# Altium PCB PCB2CPY.PcbDoc
Units mil, origin at the board's own origin, x right, y up, seen from the top; angles counter-clockwise.
Board outline 6000 x 4000 mil, 2 copper layers (Top Layer, Bottom Layer); 73 components, 143 nets, 481 pads, 98 vias.
Unrouted connection lines stored in the file: 189.
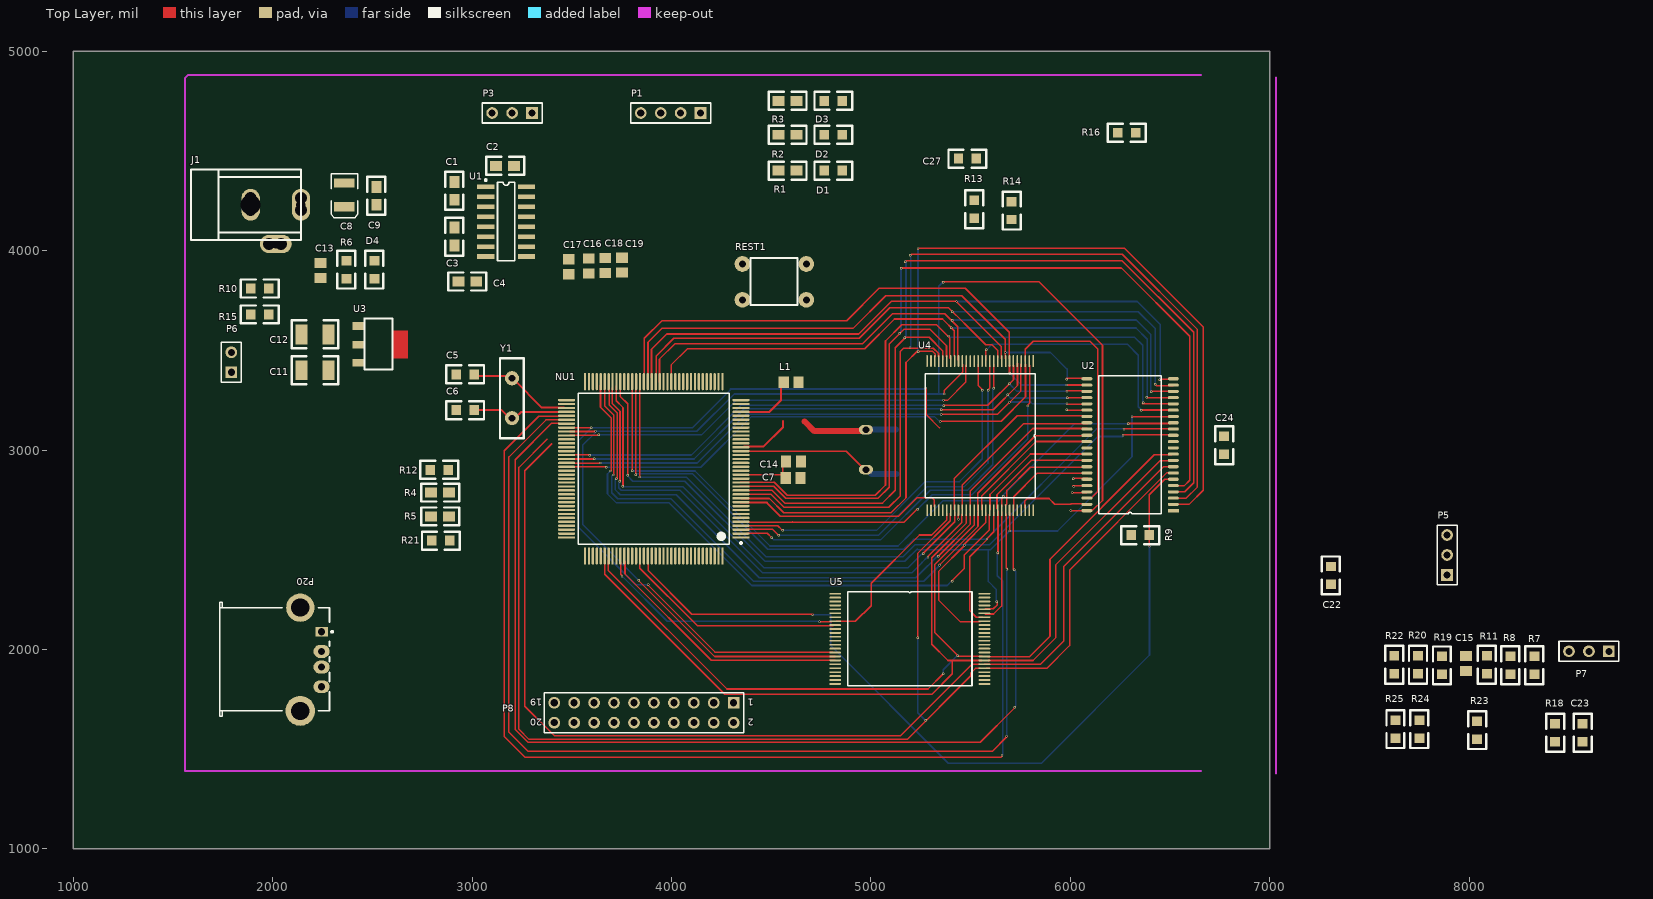
[diagram p0: Top Layer view]
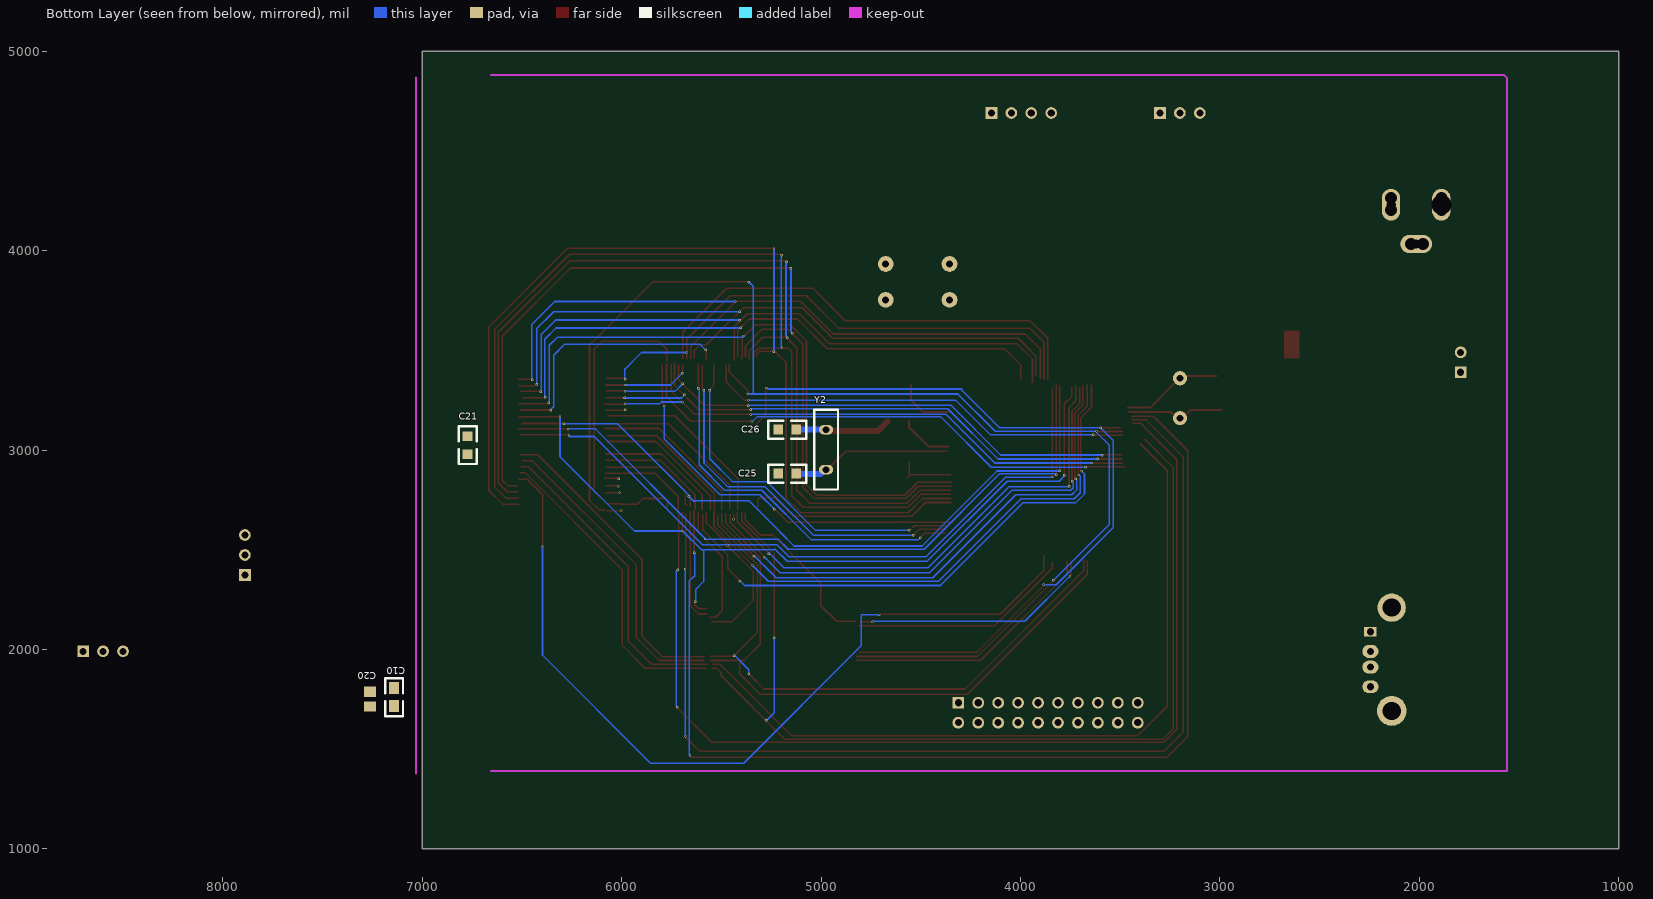
[diagram p1: Bottom Layer view, seen from below]

## Layer stack, top to bottom
Top Layer: signal copper 1.4
Dielectric: dielectric 12.6, FR-4, Dk 4.8
Bottom Layer: signal copper 1.4

## Board outline
1000,1000 7000,1000 7000,5000 1000,5000

## Design rules (kind name [scope] priority, off if disabled: settings)
Clearance [All] p1: gap=6
PolygonConnect [All] p1: connectstyle=Relief reliefconductorwidth=10 reliefentries=4 polygonreliefangle="90 Angle"
RoutingVias [All] p1: holewidth=28 width=50 viastyle="Through Hole" minholewidth=28 minwidth=50 maxholewidth=28 maxwidth=50
SilkscreenOverComponentPads [All] p1: minsilkscreentomaskgap=10
SolderMaskExpansion [All] p1: expansion=4
TestPointUsage [All] p1: valid=0 allowmultiple=FALSE
Testpoint [All] p1: side=15 testpointundercomponent=TRUE minsize=40 maxsize=100 preferedsize=60 minholesize=0 maxholesize=40 preferedholesize=32 testpointgrid=1 style=1023 order=0-112345678
Width [All] p1: maxlimit=50 minlimit=6 preferedwidth=10 minimp=50.000000 maximp=50.000000 favimp=50.000000
23 further rules are at their usual default settings.

## Classes and differential pairs
net class U1_Nets: GND NetC1_1 NetC1_2 NetC2_2 NetC3_1 NetC3_2 NetC4_1 NetU1_7 NetU1_8 NetU1_9 NetU1_10 PA9 PA10 R1IN T1OUT VDD5
net class C4_Nets: GND NetC4_1
net class C2_Nets: NetC2_2 VDD5
component class EXTERN: 1 C1 C2 C3 C4 D1 D2 D3 P1 P3 P20 R1 R2 R3 R4 R5 U1
component class GPIO_OUT: C5 C6 Y1
component class POWER: C7 C8 C9 C10 C11 C12 C13 C14 C15 C16 C17 C18 C19 C20 D4 J1 L1 NU1 R6 U3
component class STORAGE: C21 C22 C23 C24 P5 P6 R7 R8 R9 R10 R11 R12 R13 R14 R15 U2 U4 U5
component class "XLAT AND JTAG": C25 C26 C27 P7 P8 R16 R18 R19 R20 R21 R22 R23 R24 R25 REST1 Y2
net class C1_Nets: NetC1_1 NetC1_2
net class C3_Nets: NetC3_1 NetC3_2
net class C5_Nets: GND PB14
net class C6_Nets: GND PB15
net class C7_Nets: GND VDD33
net class C8_Nets: GND VDD5
net class C9_Nets: GND VDD5
net class C10_Nets: GND VDD33
net class C11_Nets: GND VDD5
net class C12_Nets: GND VDD33
net class C13_Nets: GND VDD5
net class C14_Nets: GND VDD33
net class C15_Nets: GND VDD33
net class C16_Nets: GND VDD33
net class C17_Nets: GND VDD33
net class C18_Nets: GND VDD33
net class C19_Nets: GND VDD33
net class C20_Nets: GND VDD33
net class C21_Nets: GND VDD33
net class C22_Nets: GND VDD33
net class C23_Nets: GND VDD33
net class C24_Nets: GND NetC24_1
net class C25_Nets: GND OSCIN
net class C27_Nets: GND NRST
net class D1_Nets: NetD1_2 VDD33
net class D2_Nets: NetD2_2 VDD33
net class D3_Nets: NetD3_2 VDD33
net class D4_Nets: GND NetD4_1
net class J1_Nets: GND VDD5
net class L1_Nets: NetL1_1 VDD33
net class NU1_Nets: A0 A1 A2 A3 A4 A5 A6 A7 A8 A9 A10 A11 A12 A13 A14 A15 A16 A17 A18 A19 A20 A21 A22 A23 BOOT0 D0 D1 D2 D3 D4 D5 D6 D7 D8 D9 D10 D11 D12 D13 D14 D15 GND LED0 LED1 LED2 NetL1_1 NetNU1_6 NetNU1_106 NRST OSCIN OSCOUT PA0 PA1 PA2 PA3 PA4 PA5 PA6 PA7 PA8 PA9 PA10 PA11 PA12 PA13 PA14 PA15 PB0 PB1 PB2 PB3 PB4 PB5 PB6 PB7 PB8 PB9 PB10 PB11 PB12 PB13 PB14 PB15 PC0 PC1 PC2 PC3 PC4 PC5 PC6 PC7 PC8 PC9 PC10 PC11 PC12 PC13 PC14 PC15 PD2 PD3 PD4 PD5 PD6 PD7 PE0 PE1 PF6 PF10 PF11 PG6 PG7 PG8 PG9 PG10 PG11 PG12 PG13 PG14 PG15 VDD33
net class P1_Nets: PA5 PA6 PA7 PA8
net class P3_Nets: GND R1IN T1OUT
net class P5_Nets: NetP5_2 PD6 PG6
net class P6_Nets: GND NetP6_2
net class P7_Nets: BOOT0 GND VDD33
net class P8_Nets: GND NetP8_11 NetP8_17 NetP8_19 NRST PA13 PA14 PA15 PB3 PB4 VDD33
net class P20_Nets: GND NetP20_2 NetP20_3 NetP20_5 NetP20_6 "USB 5V"
net class R1_Nets: LED0 NetD1_2
net class R2_Nets: LED1 NetD2_2
net class R3_Nets: LED2 NetD3_2
net class R4_Nets: NetP20_2 PA11
net class R5_Nets: NetP20_3 PA12
net class R6_Nets: NetD4_1 VDD33
net class R7_Nets: GND NetR7_1
net class R8_Nets: NetR7_1 VDD33
net class R9_Nets: PG10 VDD33
net class R10_Nets: NetR10_1 VDD33
net class R11_Nets: PG9 VDD33
net class R12_Nets: PG6 VDD33
net class R13_Nets: PD6 VDD33
net class R14_Nets: NetC24_1 VDD33
net class R15_Nets: NetP6_2 VDD33
net class R16_Nets: NRST VDD33
net class R18_Nets: PB4 VDD33
net class R20_Nets: PA14 VDD33
net class R21_Nets: PA13 VDD33
net class R22_Nets: GND PA14
net class R23_Nets: GND NetP8_11
net class R24_Nets: GND NetP8_17
net class R25_Nets: GND NetP8_19
net class REST1_Nets: GND NRST
net class U2_Nets: A0 A1 A2 A3 A4 A5 A6 A7 A8 A9 A10 A11 A12 A13 A14 A15 A16 A17 A18 D0 D1 D2 D3 D4 D5 D6 D7 D8 D9 D10 D11 D12 D13 D14 D15 GND PD4 PD5 PE0 PE1 PG10 VDD33
net class U3_Nets: GND VDD5 VDD33
net class A[0..23]: A0 A1 A2 A3 A4 A5 A6 A7 A8 A9 A10 A11 A12 A13 A14 A15 A16 A17 A18 A19 A20 A21 A22 A23 NetU4_1 NetU4_27 NetU4_28 NetU4_30 NetU4_55 NetU4_56
net class U5_Nets: A16 A17 D0 D1 D2 D3 D4 D5 D6 D7 GND NetP5_2 NetR7_1 PD4 PD5 PD7 VDD33
net class Y1_Nets: PB14 PB15
net class D[0..15]: AD0 AD1 AD2 AD3 AD4 AD5 AD6 AD7 AD8 AD9 AD10 AD11 AD12 AD13 AD14 AD15 AD16 AD17 AD18 AD19 AD20 AD21 AD22 AD23 D0 D1 D2 D3 D4 D5 D6 D7 D8 D9 D10 D11 D12 D13 D14 D15 DATA0 DATA1 DATA2 DATA3 DATA4 DATA5 DATA6 DATA7 DATA8 DATA9 DATA10 DATA11 DATA12 DATA13 DATA14 DATA15 NetU4_1 NetU4_27 NetU4_28 NetU4_30 NetU4_55 NetU4_56
net class U4_Nets: A0 A1 A2 A3 A4 A5 A6 A7 A8 A9 A10 A11 A12 A13 A14 A15 A16 A17 A18 A19 A20 A21 A22 D0 D1 D2 D3 D4 D5 D6 D7 D8 D9 D10 D11 D12 D13 D14 D15 GND NetC24_1 NetP6_2 NetR10_1 NetU4_1 NetU4_27 NetU4_28 NetU4_30 NetU4_55 NetU4_56 PD4 PD5 PD6 PG9 VDD33
net class R19_Nets: PA15 VDD33
net class C26_Nets: GND OSCOUT
net class Y2_Nets: OSCIN OSCOUT

## Components (designator, comment, footprint, x,y, rotation, side; value= is the part's Value field where it differs from the comment)
C1 "0.1uF" 0805#1 2911,4345 r270 top
C2 "0.1uF" 0805#1 3211,4425 r180 top
C3 "0.1uF" 0805#1 2911,4025 r90 top
C4 "0.1uF" 0805#1 2931,3845 r0 top
C5 "Cap" 0805#2 2920,3380 r0 top
C6 "Cap" 0805#2 2920,3200 r0 top
C7 "Cap" 6-0805 4610,2860 r180 top
C8 "Cap Pol2" 3.5X2.8X1.9 2360,4280 r270 top
C9 "102" 0805#1 2520,4320 r270 top
C10 "102" 0805#1 7141,1806 r270 bottom
C11 "2.2uf" 1210 2280,3400 r180 top
C12 "2.2uf" 1210 2280,3580 r180 top
C13 "Cap" 6-0805 2240,3900 r90 top
C14 "Cap" 6-0805 4612,2942 r180 top
C15 "Cap" 6-0805 7984,1930 r90 top
C16 "Cap" 6-0805 3585,3923 r270 top
C17 "Cap" 6-0805 3485,3919 r270 top
C18 "Cap" 6-0805 3668,3925 r270 top
C19 "Cap" 6-0805 3752,3927 r270 top
C20 "Cap" 6-0805 7262,1751 r90 bottom
C21 "Cap" 0805#2 6772,3070 r270 bottom
C22 "Cap" 0805#2 7306,2416 r270 top
C23 "Cap" 0805#2 8569,1628 r270 top
C24 "Cap" 0805#2 6771,2979 r90 top
C25 "Cap" 0805#2 5215,2882 r180 bottom
C26 "Cap" 0805#2 5215,3102 r180 bottom
C27 "Cap" 0805#2 5439,4461 r0 top
D1 "LED0" 0805#2 4857,4401 r180 top
D2 "LED0" 0805#2 4857,4581 r180 top
D3 "LED0" 0805#2 4857,4751 r180 top
D4 "LED3" 0805#2 2510,3950 r270 top
J1 "PWR2.5" Power_In 1872,4320 r0 top
L1 "Inductor" 6-0805 4600,3340 r0 top
NU1 "STM32F103ZET6" LQFN144 3911,2906 r180 top
P1 "Header 4" HDR1X4 4146,4690 r180 top
P3 "Header 3" HDR1X3 3301,4690 r180 top
P5 "Header 3" HDR1X3 7889,2374 r90 top
P6 "Header 2" HDR1X2 1793,3390 r90 top
P7 "Header 3" HDR1X3 8700,1991 r180 top
P8 "Header 10X2" HDR2X10 4312,1733 r180 top
P20 "P10" 787616 1734,1951 r180 top
R1 "Res2" 0805#1 4537,4401 r0 top
R2 "Res2" 0805#1 4537,4581 r0 top
R3 "Res2" 0805#1 4537,4751 r0 top
R4 "Res2" 0805#1 2795,2787 r0 top
R5 "Res2" 0805#1 2795,2667 r0 top
R6 "Res2" 0805#2 2370,3950 r270 top
R7 "Res2" 0805#2 8326,1876 r90 top
R8 "Res2" 0805#2 8206,1876 r90 top
R9 "Res2" 0805#2 6396,2573 r180 top
R10 "Res2" 0805#2 1890,3810 r0 top
R11 "Res2" 0805#2 8088,1968 r270 top
R12 "Res2" 0805#2 2881,2901 r180 top
R13 "Res2" 0805#2 5518,4162 r90 top
R14 "Res2" 0805#2 5706,4246 r270 top
R15 "Res2" 0805#2 1980,3680 r180 top
R16 "Res2" 0805#2 6327,4591 r180 top
R18 "Res2" 0805#2 8431,1628 r270 top
R19 "Res2" 0805#2 7863,1965 r270 top
R20 "Res2" 0805#2 7743,1968 r270 top
R21 "Res2" 0805#2 2889,2546 r180 top
R22 "Res2" 0805#2 7624,1968 r270 top
R23 "Res2" 0805#2 8040,1551 r90 top
R24 "Res2" 0805#2 7750,1556 r90 top
R25 "Res2" 0805#2 7630,1556 r90 top
REST1 "SW_PB" SWPB 4676,3933 r0 top
U1 "MAX232-2" SOIC16 3171,4145 r270 top
U2 "IS61LV51216-10T" TSOP44 6516,2696 r180 top
U3 "LM1117-3.3" SOT-223 2600,3660 r270 top
U4 "M29W128GL" TSOP56 5813,3446 r270 top
U5 "NAND512W3A2CN6E" TSOP48 4821,2280 r0 top
Y1 "XTAL" XTAL-1#1 3200,3160 r90 top
Y2 "XTAL" XTAL-1#2 4975,3102 r270 bottom

## Footprints (in the part's own frame and the unit in brackets; to place one, negate y for a bottom-side part, rotate by r counter-clockwise, add the part's x,y. Pads: shape width x height; smd on the part's side, far side on the other; paste and mask are expansions set on the pad)
3.5X2.8X1.9 [mm] "SM LED; 2 C-Bend Leads; Body 3.5 x 2.8 x 1.9 mm, inc leads (LxWxH typ)"
  rect 1.203x2.6 smd: 1(-1.5,0) 2(1.5,0)
  silkscreen extent -2.65,-1.7 2.95,1.7
6-0805 [mm] "Chip Resistor; Body 2.0 x 1.3 mm (LxW typ)"
  rect 1.3x1.5 smd: 1(-0.95,0) 2(0.95,0)
0805#1 [mil]
  rect 60x50 smd: 1(0,0) 2(90,0)
  silkscreen extent -50,-45 140,45
0805#2 [mil]
  rect 47.37x50 smd: 1(0,0) 2(90,0)
  silkscreen extent -50,-45 140,45
1210 [mil]
  rect 60x100 smd: 1(0,0) 2(135,0)
  silkscreen extent -50,-70 185,70
787616 [mm] "Connector; USB1.1, Type A, Thru-Hole; 4 Position; Right Angle"
  rect 1.606x1.2 hole 0.92: 1(-12.99,-3.5)
  oval 2.057x1.676 hole 0.92: 2(-12.99,-1) 3(-12.99,1)
  oval 2.057x1.6 hole 0.92: 4(-12.99,3.5)
  round 3.8 hole 2.3: 5(-10.28,6.57)
  round 3.6 hole 2.3: 6(-10.28,-6.57)
  silkscreen extent -14.47,-7.25 0,7.25
HDR1X2 [mm] "Connector; Header; 2 Position"
  rect 1.5x1.5 hole 0.9: 1(0,0)
  round 1.5 hole 0.9: 2(2.54,0)
  silkscreen extent -1.27,-1.27 3.81,1.27
HDR1X3 [mm] "Connector; Header; 3 Position"
  rect 1.5x1.5 hole 0.9: 1(0,0)
  round 1.5 hole 0.9: 2(2.54,0) 3(5.08,0)
  silkscreen extent -1.27,-1.27 6.35,1.27
HDR1X4 [mm] "Connector; Header; 4 Position"
  rect 1.5x1.5 hole 0.9: 1(0,0)
  round 1.5 hole 0.9: 2(2.54,0) 3(5.08,0) 4(7.62,0)
  silkscreen extent -1.27,-1.27 8.89,1.27
HDR2X10 [mm] "Connector; Header; 10x2 Position"
  rect 1.5x1.5 hole 0.9: 1(0,0)
  round 1.5 hole 0.9: 2(0,2.54) 3(2.54,0) 4(2.54,2.54) 5(5.08,0) 6(5.08,2.54) 7(7.62,0) 8(7.62,2.54) 9(10.16,0) 10(10.16,2.54) 11(12.7,0) 12(12.7,2.54) 13(15.24,0) 14(15.24,2.54) 15(17.78,0) 16(17.78,2.54) 17(20.32,0) 18(20.32,2.54) 19(22.86,0) 20(22.86,2.54)
  silkscreen extent -1.27,-1.27 24.13,3.81
LQFN144 [mm] "TSQFP, 144-Leads, Body 23.8x23.8mm (max), Pitch 0.50mm, IPC Medium Density"
  oval 2.2x0.3 smd: 1(-11.1,8.75) 2(-11.1,8.25) 3(-11.1,7.75) 4(-11.1,7.25) 5(-11.1,6.75) 6(-11.1,6.25) 7(-11.1,5.75) 8(-11.1,5.25) 9(-11.1,4.75) 10(-11.1,4.25) 11(-11.1,3.75) 12(-11.1,3.25) 13(-11.1,2.75) 14(-11.1,2.25) 15(-11.1,1.75) 16(-11.1,1.25) 17(-11.1,0.75) 18(-11.1,0.25) 19(-11.1,-0.25) 20(-11.1,-0.75) 21(-11.1,-1.25) 22(-11.1,-1.75) 23(-11.1,-2.25) 24(-11.1,-2.75) 25(-11.1,-3.25) 26(-11.1,-3.75) 27(-11.1,-4.25) 28(-11.1,-4.75) 29(-11.1,-5.25) 30(-11.1,-5.75) 31(-11.1,-6.25) 32(-11.1,-6.75) 33(-11.1,-7.25) 34(-11.1,-7.75) 35(-11.1,-8.25) 36(-11.1,-8.75) 73(11.1,-8.75) 74(11.1,-8.25) 75(11.1,-7.75) 76(11.1,-7.25) 77(11.1,-6.75) 78(11.1,-6.25) 79(11.1,-5.75) 80(11.1,-5.25) 81(11.1,-4.75) 82(11.1,-4.25) 83(11.1,-3.75) 84(11.1,-3.25) 85(11.1,-2.75) 86(11.1,-2.25) 87(11.1,-1.75) 88(11.1,-1.25) 89(11.1,-0.75) 90(11.1,-0.25) 91(11.1,0.25) 92(11.1,0.75) 93(11.1,1.25) 94(11.1,1.75) 95(11.1,2.25) 96(11.1,2.75) 97(11.1,3.25) 98(11.1,3.75) 99(11.1,4.25) 100(11.1,4.75) 101(11.1,5.25) 102(11.1,5.75) 103(11.1,6.25) 104(11.1,6.75) 105(11.1,7.25) 106(11.1,7.75) 107(11.1,8.25) 108(11.1,8.75)
  oval 0.3x2.2 smd: 37(-8.75,-11.1) 38(-8.25,-11.1) 39(-7.75,-11.1) 40(-7.25,-11.1) 41(-6.75,-11.1) 42(-6.25,-11.1) 43(-5.75,-11.1) 44(-5.25,-11.1) 45(-4.75,-11.1) 46(-4.25,-11.1) 47(-3.75,-11.1) 48(-3.25,-11.1) 49(-2.75,-11.1) 50(-2.25,-11.1) 51(-1.75,-11.1) 52(-1.25,-11.1) 53(-0.75,-11.1) 54(-0.25,-11.1) 55(0.25,-11.1) 56(0.75,-11.1) 57(1.25,-11.1) 58(1.75,-11.1) 59(2.25,-11.1) 60(2.75,-11.1) 61(3.25,-11.1) 62(3.75,-11.1) 63(4.25,-11.1) 64(4.75,-11.1) 65(5.25,-11.1) 66(5.75,-11.1) 67(6.25,-11.1) 68(6.75,-11.1) 69(7.25,-11.1) 70(7.75,-11.1) 71(8.25,-11.1) 72(8.75,-11.1) 109(8.75,11.1) 110(8.25,11.1) 111(7.75,11.1) 112(7.25,11.1) 113(6.75,11.1) 114(6.25,11.1) 115(5.75,11.1) 116(5.25,11.1) 117(4.75,11.1) 118(4.25,11.1) 119(3.75,11.1) 120(3.25,11.1) 121(2.75,11.1) 122(2.25,11.1) 123(1.75,11.1) 124(1.25,11.1) 125(0.75,11.1) 126(0.25,11.1) 127(-0.25,11.1) 128(-0.75,11.1) 129(-1.25,11.1) 130(-1.75,11.1) 131(-2.25,11.1) 132(-2.75,11.1) 133(-3.25,11.1) 134(-3.75,11.1) 135(-4.25,11.1) 136(-4.75,11.1) 137(-5.25,11.1) 138(-5.75,11.1) 139(-6.25,11.1) 140(-6.75,11.1) 141(-7.25,11.1) 142(-7.75,11.1) 143(-8.25,11.1) 144(-8.75,11.1)
  silkscreen extent -11.23,-9.6 9.6,9.6, body extent -10,-10 10,10, height 1.6
Power_In [mil]
  rect 60x60 hole 60: 1(270,-116) 2(170,-287) 3(18,-57)
  oval 92x160 hole 47: 1(270,-90)
  rect 50x60 hole 60: 1(270,-57) 3(18,-116)
  rect 60x50 hole 60: 2(111,-287)
  oval 160x92 hole 47: 2(144,-287)
  oval 92x160 hole 100: 3(18,-90)
  silkscreen extent -281,-267 270,87
SOIC16 [mm]
  rect 0.6x2.2 smd: 1(-4.445,-2.6) 2(-3.175,-2.6) 3(-1.905,-2.6) 4(-0.635,-2.6) 5(0.635,-2.6) 6(1.905,-2.6) 7(3.175,-2.6) 8(4.445,-2.6) 9(4.445,2.6) 10(3.175,2.6) 11(1.905,2.6) 12(0.635,2.6) 13(-0.635,2.6) 14(-1.905,2.6) 15(-3.175,2.6) 16(-4.445,2.6)
  silkscreen extent -5.42,-2.72 5,1.1
SOT-223 [mm]
  rect 1x1.5 smd: 1(0.95,-4.31) 2(3.35,-4.31) 3(5.65,-4.31)
  Top Layer region: 1.524,0 5.08,0 5.08,2.032 1.524,2.032
  silkscreen extent 0,-3.56 6.5,0
SWPB [mm]
  round 2 hole 0.9: 1(-8.128,0) 2(-8.128,-4.572) 3(0,-4.572) 4(0,0)
  silkscreen extent -7.13,-5.25 -1.13,0.75
TSOP44 [mm]
  rect 1.4x0.4 smd: 1(0,0)
  oval 1.4x0.4 smd: 2(0,-0.8) 3(0,-1.6) 4(0,-2.4) 5(0,-3.2) 6(0,-4) 7(0,-4.8) 8(0,-5.6) 9(0,-6.4) 10(0,-7.2) 11(0,-8) 12(0,-8.8) 13(0,-9.6) 14(0,-10.4) 15(0,-11.2) 16(0,-12) 17(0,-12.8) 18(0,-13.6) 19(0,-14.4) 20(0,-15.2) 21(0,-16) 22(0,-16.8) 23(11,-16.8) 24(11,-16) 25(11,-15.2) 26(11,-14.4) 27(11,-13.6) 28(11,-12.8) 29(11,-12) 30(11,-11.2) 31(11,-10.4) 32(11,-9.6) 33(11,-8.8) 34(11,-8) 35(11,-7.2) 36(11,-6.4) 37(11,-5.6) 38(11,-4.8) 39(11,-4) 40(11,-3.2) 41(11,-2.4) 42(11,-1.6) 43(11,-0.8) 44(11,0)
  silkscreen extent 1.53,-17.2 9.47,0.4
TSOP48 [mm]
  rect 1.5x0.22 smd: 1(0,0)
  oval 1.5x0.22 smd: 2(0,-0.5) 3(0,-1) 4(0,-1.5) 5(0,-2) 6(0,-2.5) 7(0,-3) 8(0,-3.5) 9(0,-4) 10(0,-4.5) 11(0,-5) 12(0,-5.5) 13(0,-6) 14(0,-6.5) 15(0,-7) 16(0,-7.5) 17(0,-8) 18(0,-8.5) 19(0,-9) 20(0,-9.5) 21(0,-10) 22(0,-10.5) 23(0,-11) 24(0,-11.5) 25(19,-11.5) 26(19,-11) 27(19,-10.5) 28(19,-10) 29(19,-9.5) 30(19,-9) 31(19,-8.5) 32(19,-8) 33(19,-7.5) 34(19,-7) 35(19,-6.5) 36(19,-6) 37(19,-5.5) 38(19,-5) 39(19,-4.5) 40(19,-4) 41(19,-3.5) 42(19,-3) 43(19,-2.5) 44(19,-2) 45(19,-1.5) 46(19,-1) 47(19,-0.5) 48(19,0)
  silkscreen extent 1.58,-11.75 17.42,0.25
TSOP56 [mm]
  rect 1.5x0.2 smd: 1(0,0)
  oval 1.5x0.2 smd: 2(0,-0.5) 3(0,-1) 4(0,-1.5) 5(0,-2) 6(0,-2.5) 7(0,-3) 8(0,-3.5) 9(0,-4) 10(0,-4.5) 11(0,-5) 12(0,-5.5) 13(0,-6) 14(0,-6.5) 15(0,-7) 16(0,-7.5) 17(0,-8) 18(0,-8.5) 19(0,-9) 20(0,-9.5) 21(0,-10) 22(0,-10.5) 23(0,-11) 24(0,-11.5) 25(0,-12) 26(0,-12.5) 27(0,-13) 28(0,-13.5) 29(19,-13.5) 30(19,-13) 31(19,-12.5) 32(19,-12) 33(19,-11.5) 34(19,-11) 35(19,-10.5) 36(19,-10) 37(19,-9.5) 38(19,-9) 39(19,-8.5) 40(19,-8) 41(19,-7.5) 42(19,-7) 43(19,-6.5) 44(19,-6) 45(19,-5.5) 46(19,-5) 47(19,-4.5) 48(19,-4) 49(19,-3.5) 50(19,-3) 51(19,-2.5) 52(19,-2) 53(19,-1.5) 54(19,-1) 55(19,-0.5) 56(19,0)
  silkscreen extent 1.58,-13.75 17.42,0.25
XTAL-1#1 [mm]
  round 1.8 hole 0.85: 1(0,0) 2(5.08,0)
  silkscreen extent -2.54,-1.52 7.62,1.52
XTAL-1#2 [mm]
  oval 1.203x1.8 hole 0.85: 1(0,0) 2(5.08,0)
  silkscreen extent -2.54,-1.52 7.62,1.52

## Part data
C1 C2 C3 C4 C9 C10 C11 C12: library part CAP, "Capacitor"
C5 C6 C7 C13 C14 C15 C16 C17 C18 C19 C20 C21 C22 C23 C24 C25 C26 C27: "Capacitor"
C8: "Polarized Capacitor (Axial)"
D1 D2 D3: "Typical INFRARED GaAs LED"
D4: "Typical BLUE SiC LED"
J1: "Low Voltage Power Supply Connector"
P1: "Header, 4-Pin"
P3 P5 P7: "Header, 3-Pin"
P6: "Header, 2-Pin"
P8: "Header, 10-Pin, Dual row"
P20: library part COMPONENT_1
R1 R2 R3 R4 R5 R6 R7 R8 R9 R10 R11 R12 R13 R14 R15 R16 R18 R19 R20 R21 R22 R23 R24 R25: "Resistor"
U1: library part MAX3232-2
Y1 Y2: "Crystal Oscillator"

## Via types
v1: diameter 12, hole 7, Top Layer to Bottom Layer, 96 vias
v2: diameter 10, hole 7, Top Layer to Bottom Layer, 2 vias

## Nets (pads, with @x,y where several pads share a name; then routed paths per layer and width w, separated by ;. In a path a pad name is that pad's centre, name@x,y a point inside that pad or via, vN(x,y) a via of type N, cw(c..) or ccw(c..) an arc to the next point about the centre after c; other vN are vias at no path point)
A0: NU1.10 U2.1 U4.31 | length 1079.4
  Top Layer w8: NU1.10@4345,2737 4479,2737 ; 4477,2736 4545,2668 5138,2668 5230,2760 5308,2760 5318,2750 U4.31@5318,2716
A1: NU1.11 U2.2 U4.26 | length 4856.3
  Top Layer w8: NU1.11@4350,2757 4491,2757 4563,2685 5101,2685 5176,2760 5176,3439 5232,3495 5309,3495 5322,3482 U4.26@5322,3468 ; v1@5236,4007 5240,4011 6272,4011 6666,3617 6666,2798 6597,2729 U2.2@6517,2729
  Bottom Layer w8: v1@5236,3495 5236,4004 v1@5237,4005
  other v1: 5237,3493 5236,4009
A2: NU1.12 U2.3 U4.25 | length 4786.2
  Top Layer w8: NU1.12@4353,2778 4499,2778 4564,2713 5090,2713 5148,2771 5148,3496 5163,3511 5313,3511 5339,3485 U4.25@5339,3467 ; v1(5197,3976) 5203,3982 6260,3982 6637,3605 6637,2815 6580,2758 U2.3@6519,2758
  Bottom Layer w8: v1@5199,3511 5199,3970
  other v1: 5196,3514
A3: NU1.13 U2.4 U4.24 | length 4720.1
  Top Layer w8: NU1.13@4351,2798 4504,2798 4568,2734 5058,2734 5122,2798 5122,3513 5174,3565 5292,3565 5361,3496 U4.24@5361,3453 ; v1@5170,3941 5179,3950 6258,3950 6618,3590 6618,2836 6573,2791 U2.4@6521,2791
  Bottom Layer w8: v1@5170,3567 5176,3573 v1@5176,3943
  other v1: 5170,3564 5173,3944
A4: NU1.14 U2.5 U4.23 | length 4651.7
  Top Layer w8: NU1.14@4342,2818 4513,2818 4573,2758 5036,2758 5092,2814 5092,3532 5166,3606 5296,3606 5379,3523 U4.23@5379,3467 ; v1@5151,3913 6256,3913 6598,3571 6598,2848 6570,2820 U2.5@6520,2820
  Bottom Layer w8: v1@5143,3587 5151,3595 v1@5151,3910
  other v1: 5145,3586 5153,3912
A5: NU1.15 U2.18 U4.22 | length 3422.5
  Top Layer w8: NU1.15@4345,2838 4515,2838 4580,2773 5021,2773 5073,2825 5073,3547 5154,3628 5329,3628 5396,3561 5396,3460 U4.22@5399,3457 ; v1@6361,3233 U2.18@6512,3233
  Bottom Layer w8: v1@5386,3572 5392,3566 6322,3566 6363,3525 v1@6363,3238
  other v1: 6365,3237 5390,3572
A6: NU1.50 U2.19 U4.21 | length 3155.7
  Top Layer w8: NU1.50@3998,3352 3998,3426 4080,3508 4969,3508 5118,3657 5359,3657 5418,3598 U4.21@5418,3470 ; v1@6385,3262 U2.19@6499,3262
  Bottom Layer w8: v1@5402,3612 6329,3612 6386,3555 v1@6386,3263
  other v1: 6383,3264 5403,3614
A7: NU1.53 U2.20 U4.20 | length 3312
  Top Layer w8: NU1.53@3940,3339 3940,3456 4016,3532 4956,3532 5108,3684 5370,3684 5436,3618 U4.20@5436,3450 ; v1@6407,3294 U2.20@6505,3294
  Bottom Layer w8: v1@5407,3652 6330,3652 6403,3579 v1@6403,3294
  other v1: 6406,3292 5407,3651
A8: NU1.54 U2.21 U4.10 | length 3459.2
  Top Layer w8: NU1.54@3923,3374 3923,3472 4011,3560 4941,3560 5095,3714 5389,3714 5469,3634 ; 5468,3636 5576,3528 5607,3528 5635,3500 U4.10@5635,3462 ; v1@6429,3326 6432,3323 U2.21@6516,3323
  Bottom Layer w8: v1@5409.5,3693.5 6341.5,3693.5 ; 6341,3694 6426,3609 v1(6426,3329)
  other v1: 5408,3693
A9: NU1.55 U2.22 U4.9 | length 3569.7
  Top Layer w8: NU1.55@3900,3362 3900,3506 3976,3582 4939,3582 5103,3746 5427,3746 5654,3519 U4.9@5654,3457 ; v1@6446,3350 6450,3354 U2.22@6519,3354
  Bottom Layer w8: v1(5429,3745) 6335,3745 6450,3630 v1@6450,3357
  other v1: 6448,3352
A10: NU1.56 U2.23 U4.8 | length 2754.1
  Top Layer w8: NU1.56@3882,3354 3882,3541 3951,3610 4910,3610 5074,3774 5455,3774 5674,3555 U4.8@5674,3457 ; v1@5978,3356 5982,3360 U2.23@6075,3360
  Bottom Layer w8: v1@5676,3489 5900,3489 5985,3404 ; v1@5985,3360 5985,3407
  other v1: 5982,3355 5674,3489
A11: NU1.57 U2.24 U4.7 | length 2815.6
  Top Layer w8: NU1.57@3863,3353 3863,3560 3952,3649 4879,3649 5041,3811 5473,3811 5694,3590 U4.7@5694,3459 ; U4.7@5695,3425 5695,3387 v1@5700,3382 ; v1(5982,3326) U2.24@6079,3326
  Bottom Layer w8: v1@5697,3384 5755,3326 v1(5982,3326)
  other v1: 5697,3386
A12: NU1.87 U2.25 U4.6 | length 2853.7
  Top Layer w8: NU1.87@3489,2977 v1@3588,2977 ; v1@5366,3224 5586,3224 5715,3353 U4.6@5715,3426 ; v1@5980,3296 5981,3297 U2.25@6078,3297
  Bottom Layer w8: v1@3593,2975 4100,2975 4349,3224 v1@5366,3224 ; v1(5694,3332) 5732,3294 v1(5983,3294)
  other v1: 3590,2974 5365,3222
A13: NU1.88 U2.26 U4.5 | length 2916.6
  Top Layer w8: NU1.88@3494,2955 v1@3610,2955 ; v1@5353,3202 5613,3202 5735,3324 U4.5@5735,3434 ; v1@5984,3264 v1(5985.07,3262.93) U2.26
  Bottom Layer w8: v1@3616,2955 4113,2955 4365,3207 5353,3207 v1@5355,3205 ; v1@5682,3279 5700,3261 v1@5989,3261
  other v1: 3612,2956 5353,3203 5686,3277
A14: NU1.89 U2.27 U4.4 | length 2945.8
  Top Layer w8: NU1.89@3488,2934 3640,2934 v1@3641,2935 ; v1@5352,3179 5635,3179 5752,3296 U4.4@5752,3430 ; v1@5980,3233 5984,3229 U2.27@6088,3229
  Bottom Layer w8: 3649,2935 4129,2935 4374,3180 5348,3180 v1@5353,3175 ; v1@5694,3240 5695,3241 5800,3241 5808,3233 v1(5983,3233)
  other v1: 3643,2935 5353,3178 5695,3239
A15: NU1.90 U2.42 U4.3 | length 3835
  Top Layer w8: NU1.90@3478,2917 v1@3672,2917 ; v1@5349,3145 5653,3145 5775,3267 U4.3@5775,3431 ; U4.3 5773.63,3505.63 5814,3546 6098,3546 6138,3506 6138,2794 U2.42@6108,2764
  Bottom Layer w8: v1(3672,2914) 4147,2914 4399,3166 5321,3166 v1@5346,3141
  other v1: 5347,3143
A16: NU1.80 U2.43 U4.54 U5.16 | length 4504.5
  Top Layer w8: NU1.80@3498,3112 v1(3598,3112) ; v1@3882,2323 4218,1987 U5.16@4809,1987 ; v1@5277,3309 5277,3178 5344,3111 ; U4.54@5771,2711 5771,2744 5784,2757 5893,2757 5922,2728 6004,2728 ; 6002,2730 U2.43@6074,2730
  Bottom Layer w8: v1(3598,3112) 4105,3112 4297,3304 ; v1@3599,3112 3536,3049 3536,2610 3821,2325 v1@3888,2325 ; 4296,3306 5268,3306 v1@5274,3312
  other v1: 3884,2326 5275,3311
A17: NU1.81 U2.44 U4.19 U5.17 | length 6620.1
  Top Layer w8: NU1.81@3489,3093 3614,3093 v1@3615,3094 ; v1@3835,2346 4215.96,1965.04 U5.17 ; v1@5359,3843 5844,3843 6161,3526 6161,2747 6114,2700 6102,2700 6084,2700 U2.44@6084,2695 ; v1@5368,3284 5368,3299 5460,3391 U4.19@5460,3429 ; v1@6001,2699 6004,2696 U2.44@6072,2696
  Bottom Layer w8: v1@3621,3091 3555,3025 3555,2627 v1(3835,2347) ; v1@3622,3094 4127,3094 4314,3281 5363,3281 v1@5367,3285 ; 5340,3281 5340,3822 v1@5360,3842
  other v1: 6001,2697 3619,3094 5367,3281 5363,3841
A18: NU1.82 U2.28 U4.18 | length 2275.4
  Top Layer w8: NU1.82@3491,3075 3635,3075 v1(3636,3076) ; v1@5368,3249 5384,3249 5476,3341 U4.18@5476,3424 ; v1@5981,3203 5984.06,3199.94 U2.28
  Bottom Layer w8: v1@3638,3076 4151,3076 4324,3249 v1(5364,3249)
  other v1: 5982.1,3201.9
A19: NU1.2 U4.11 | length 1899.8
  Top Layer w8: NU1.2@4377,2583 4480,2583 v1@4501,2562 ; v1@5616,3311 U4.11@5616,3429
  Bottom Layer w8: v1@4502,2560 4511,2551 5050,2551 5298,2799 5484,2799 5611,2926 v1@5611,3307
  other v1: 4503,2560 5616,3309
A20: NU1.3 U4.12 | length 1864.1
  Top Layer w8: NU1.3@4376,2603 4506,2603 v1@4534,2575 ; v1@5586,3301 5596,3311 U4.12@5596,3423
  Bottom Layer w8: v1@4535,2572 5037,2572 5280,2815 5467,2815 5587,2935 v1@5587,3301
  other v1: 4538,2573 5589,3300
A21: NU1.4 U4.15 | length 1832.8
  Top Layer w8: NU1.4@4368,2620 4533,2620 v1@4554,2599 ; U4.15@5538,3431 5538,3324 v1@5561,3301
  Bottom Layer w8: v1(4557,2597) 5028,2597 5273,2842 5444,2842 5558,2956 5558,3302 v1@5560,3304
  other v1: 5558,3300
A22: NU1.5 U4.2 | length 1989.1
  Top Layer w8: NU1.5@4340,2639 5167,2639 v1@5232,2704 ; 4606,2640 4607,2639 ; v1@5785,3225 5796,3236 U4.2@5796,3426
  Bottom Layer w8: v1(5234,2703) 5307,2776 5507,2776 5787,3056 v1@5787,3220
  other v1: 5786,3221
A23: NU1.1
BOOT0: NU1.138 P7.2
D0: U2.7 U4.35 U5.29 | length 6682.5
  Top Layer w8: 3377,3055 3235,2913 3235,1600 3286,1549 5182,1549 5501,1868 5501,1882 5524,1905 U5.29@5547,1905 ; v1@5234,2053 5234,2481 5398,2645 U4.35@5398,2682 ; U5.29@5579,1905 5881,1905 5996,2020 5996,2398 6485,2887 U2.7@6507,2887
  Bottom Layer w8: v1@5235,2056 5235,1683 v1@5273,1645
  other v1: 5275,1645 5234,2058
D1: U2.8 U4.37 U5.30 | length 5450.1
  Top Layer w8: 3399,3031 3264,2896 3264,1716 3413,1567 5148,1567 5506,1925 U5.30@5546,1925 ; v1@5438,2656 U4.37@5438,2681 ; U5.30@5569.36,1926 5850,1926 5966,2042 5966,2415 6467,2916 U2.8@6503,2916
  other v1: 5439,2654
D2: NU1.114 U2.9 U4.39 U5.31 | length 4710.4
  Top Layer w8: NU1.114@3666,2445 3666,2377 4267,1776 5306,1776 5408,1878 5408,1940 ; U4.39@5477,2678 5477,2632 5305,2460 5305,2026 5386,1945 U5.31@5555,1945 ; U5.31@5588,1945 5813,1945 5926,2058 5926,2424 6449,2947 U2.9@6499,2947
D3: NU1.115 U2.10 U4.41 U5.32 | length 4643.3
  Top Layer w8: NU1.115@3682,2446 3682,2398 4278,1802 5286,1802 v1@5362,1878 ; v1@5437,1968 5321,2084 5321,2427 5519,2625 U4.41@5519,2672 ; v1@5438,1967 U5.32@5557,1967 ; U5.32@5586,1964 5795,1964 5898,2067 5898,2453 6421,2976 U2.10@6509,2976
  Bottom Layer w8: v1@5363,1881 5363,1899 v1@5432,1968
  other v1: 5362,1879 5435,1968
D4: NU1.58 U2.13 U4.44 U5.41 | length 4320.3
  Top Layer w8: v1(3841,2865) NU1.58@3841,3311 ; U5.41@5548,2140 5447,2140 5341,2246 5341,2393 5468,2520 5468,2528.2 5575,2635.2 U4.44@5575,2686 ; v1@6263,3077 U2.13@6509,3077
  Bottom Layer w8: v1@3836,2864 4075,2864 4473,2466 5162,2466 ; 5163,2467 5222,2526 5466,2526 v1(5469,2523) ; v1@5469,2525 5594,2525 6137,3068 6262,3068
  other v1: 6264,3074
D5: NU1.59 U2.14 U4.46 U5.42 | length 4175.3
  Top Layer w8: v1@3821,2877 NU1.59@3821,3326 ; U5.42@5560,2162 5528,2162 5495,2195 5495,2465 v1@5582,2552 ; v1@5583,2557 5616,2590 U4.46@5616,2689 ; v1@6266,3106 U2.14@6521,3106
  Bottom Layer w8: v1@3822,2876 3827,2881 4105,2881 4483,2503 5164,2503 5213,2552 v1@5582,2552 ; v1@5583,2558 6131,3106 v1@6271,3106
  other v1: 5582,2554 3820,2876 6269,3105
D6: NU1.60 U2.15 U4.48 U5.43 | length 4161.8
  Top Layer w8: v1@3803,2899 NU1.60@3803,3322 ; U5.43@5574,2178 5615,2178 5655,2218 U4.48@5655,2690 ; U4.48@5656,2716 5656,2757 v1@5667,2768 ; v1@6289,3133 U2.15@6501,3133
  Bottom Layer w8: v1@3806,2895 4118,2895 4494,2519 5136,2519 5205,2588 ; 5202,2587 5360,2745 5635,2745 ; 5633,2743 5638,2743 v1(5663,2768) ; v1@5659,2770 6020,3131 v1@6288,3131
  other v1: 3803,2897 6291,3132
D7: NU1.63 U2.16 U4.50 U5.44 | length 4237.7
  Top Layer w8: NU1.63@3743,3315 3743,3269 3780,3232 v1@3780,2875 ; U5.44@5574,2204 5614,2204 5633,2223 v1@5633,2241 ; U4.50@5695,2685 5696,2684 v1@5696,2598 ; v1@6307,3166 U2.16@6514,3166
  Bottom Layer w8: v1@3777,2873 3806,2844 4067,2844 4469,2442 5170,2442 5233,2505 ; 5236,2501 5601,2501 v1@5696,2596 ; 5589,2497 5589,2341 5629,2301 v1@5629,2239 ; v1@5698,2594 5936,2594 6309,2967 v1@6309,3170
  other v1: 5631,2240 5696,2594 3780,2873 6309,3167
D8: NU1.64 U2.29 U4.36 | length 3434.3
  Top Layer w8: NU1.64@3723,3323 3723,3247 3757,3213 3757,2820 v1@3756,2819 ; v1@5260,2480 5420,2640 U4.36@5420,2688 ; U4.36@5418,2702 5418,2857 5733,3172 U2.29@6069,3172
  Bottom Layer w8: v1@3755,2817 4057,2817 4465,2409 5185,2409 v1@5260,2484
  other v1: 5262,2480 3755,2818
D9: NU1.65 U2.30 U4.38 | length 3425
  Top Layer w8: NU1.65@3703,3313 3703,3233 3742,3194 3742,2846 v1@3743,2845 ; v1@5286,2467 5456,2637 U4.38@5456,2677 ; U4.38@5457,2707 5457,2824 5765,3132 U2.30@6085,3132
  Bottom Layer w8: v1@3740,2840 3735,2835 3735,2811 3748,2798 4043,2798 4456,2385 5206,2385 5256,2435 ; 5256,2436 v1@5283,2463
  other v1: 5286,2463 3741,2843
D10: NU1.66 U2.31 U4.40 | length 3482.2
  Top Layer w8: NU1.66@3688,3321 3688,3226 3728,3186 3728,2859 v1@3726,2857 ; v1@5338,2468 5499,2629 U4.40@5499,2684 ; U4.40 5498.04,2795.04 5811,3108 U2.31@6084,3108
  Bottom Layer w8: v1@3719,2857 3719,2800 3743,2776 4024,2776 4440,2360 5225,2360 5285,2420 ; 5287,2421 5311,2445 ; 5308,2443 5333,2468 v1@5339,2468
  other v1: 5338,2467 3723,2857
D11: NU1.67 U2.32 U4.42 | length 3512.6
  Top Layer w8: NU1.67@3666,3331 3666,3221 3711,3176 3711,2878 v1@3710,2877 ; v1@5344,2426 5346,2426 5537,2617 U4.42@5537,2688 ; U4.42@5536,2696 5536,2784 5824,3072 U2.32@6072,3072
  Bottom Layer w8: v1@3706,2875 3701,2870 3701,2786 3731,2756 3997,2756 4411,2342 5265,2342 5325,2402 5325,2403 v1@5345,2423
  other v1: 5343.97,2421.97 3708,2875
D12: NU1.68 U2.35 U4.45 | length 3548.5
  Top Layer w8: NU1.68@3644,3325 3644,3215 3697,3162 v1@3697,2896 ; v1@5404,2342 5467,2405 5467,2473 5594,2600 U4.45@5594,2678 ; U4.45@5597,2700 5597,2777 5800,2980 U2.35@6079,2980
  Bottom Layer w8: v1@3690,2891 3679,2880 3679,2780 3724,2735 3989,2735 4403,2321 5382,2321 v1@5404,2343
  other v1: 5408,2342 3693,2895
D13: NU1.77 U2.36 U4.47 | length 6173.8
  Top Layer w8: NU1.77@3443,3170 3334,3170 3161,2997 3161,1564 3265,1460 5652,1460 v1@5659,1467 ; U4.47@5632,2706 5632,2776 5803.97,2947.97 U2.36 ; 5637,2480 U4.47@5637,2696
  Bottom Layer w8: v1@5634,2483 5634,2370 5660,2344 5660,1469 v1@5657,1466 ; v1@5637,2481 v1@5637,2487
  other v1: 5657,1470 5636,2486
D14: NU1.78 U2.37 U4.49 | length 5923.9
  Top Layer w8: NU1.78@3443,3151 3371,3151 3185,2965 3185,1585 3280,1490 5609,1490 v1@5681,1562 ; U4.49@5674,2723 5682,2731 5682,2797 5799,2914 U2.37@6079,2914 ; U4.49@5678,2680 5678,2410 v1@5685,2403
  Bottom Layer w8: v1@5681,1561 v1@5681,2402
  other v1: 5680,1565 5682,2402
D15: NU1.79 U2.38 U4.51 | length 5698.7
  Top Layer w8: NU1.79@3438,3134 3398,3134 3216,2952 3216,1599 3280,1535 5548,1535 v1@5720,1707 ; v1@5714,2400 U4.51@5714,2676 ; U4.51@5716,2698 5716,2766 5833,2883 U2.38@6081,2883
  Bottom Layer w8: v1@5716,2400 5726,2390 v1@5726,1715
  other v1: 5722,1711 5718,2400
GND: C4.2 C5.1 C6.1 C7.1 C8.2 C9.2 C10.2 C11.2 C12.2 C13.1 C14.1 C15.1 C16.1 C17.1 C18.1 C19.1 C20.1 C21.2 C22.2 C23.2 C24.2 C25.1 C26.1 C27.1 D4.2 J1.2 J1.3 NU1.16 NU1.30 NU1.31 NU1.38 NU1.51 NU1.61 NU1.71 NU1.83 NU1.94 NU1.107 NU1.120 NU1.130 NU1.143 P3.2 P6.1 P7.3 P8.4 P8.6 P8.8 P8.10 P8.12 P8.14 P8.16 P8.18 P8.20 P20.4 R7.2 R22.2 R23.2 R24.2 R25.2 REST1.1 U1.15 U2.12 U2.34 U3.1 U4.33 U4.52 U5.13 U5.36
LED0: NU1.19 R1.1
LED1: NU1.20 R2.1
LED2: NU1.21 R3.1
NetC1_1: C1.1 U1.1
NetC1_2: C1.2 U1.3
NetC2_2: C2.2 U1.2
NetC3_1: C3.1 U1.5
NetC3_2: C3.2 U1.4
NetC4_1: C4.1 U1.6
NetC24_1: C24.1 R14.2 U4.14
NetD1_2: D1.2 R1.2
NetD2_2: D2.2 R2.2
NetD3_2: D3.2 R3.2
NetD4_1: D4.1 R6.1
NetL1_1: L1.1 NU1.32 NU1.33 | length 297.9
  Top Layer w10: NU1.33@4352,3190 4489,3190 4549,3250 L1.1@4549,3326
NetP5_2: P5.2 U5.7
NetP6_2: P6.2 R15.2 U4.16
NetP8_11: P8.11 R23.1
NetP8_17: P8.17 R24.1
NetP8_19: P8.19 R25.1
NetP20_2: P20.2 R4.1
NetP20_3: P20.3 R5.1
NetR7_1: R7.1 R8.2 U5.19
NetR10_1: R10.1 U4.53
NRST: C27.2 NU1.25 P8.15 R16.1 REST1.2
OSCIN: C25.2 NU1.23 Y2.2 | length 804.1
  Top Layer w10: NU1.23@4368,2994 4876,2994 Y2.2@4968,2902
  Bottom Layer w30: Y2.2@4973,2909 5002,2880 C25.2@5127,2880
OSCOUT: C26.2 NU1.24 Y2.1 | length 768
  Top Layer w10: NU1.24@4363,3017 4461,3017 4559,3115 4559,3146
  Top Layer w30: 4668,3143 4716,3095 Y2.1@4992,3095
  Bottom Layer w30: Y2.1@4973,3091 4984,3102 C26.2
PA0: NU1.34
PA1: NU1.35
PA2: NU1.36
PA3: NU1.37
PA4: NU1.40
PA5: NU1.41 P1.1
PA6: NU1.42 P1.2
PA7: NU1.43 P1.3
PA8: NU1.100 P1.4
PA9: NU1.101 U1.11
PA10: NU1.102 U1.12
PA11: NU1.103 R4.2
PA12: NU1.104 R5.2
PA13: NU1.105 P8.7 R21.1
PA14: NU1.109 P8.9 R20.1 R22.1
PA15: NU1.110 P8.5 R19.1
PB0: NU1.46
PB1: NU1.47
PB2: NU1.48
PB3: NU1.133 P8.13
PB4: NU1.134 P8.3 R18.1
PB5: NU1.135
PB6: NU1.136
PB7: NU1.137
PB8: NU1.139
PB9: NU1.140
PB10: NU1.69
PB11: NU1.70
PB12: NU1.73
PB13: NU1.74
PB14: C5.2 NU1.75 Y1.2 | length 506.6
  Top Layer w10: C5.2@3018,3372 Y1.2@3217,3372 ; Y1.2@3211,3352 3350,3213 NU1.75@3461,3213
PB15: C6.2 NU1.76 Y1.1 | length 466.7
  Top Layer w10: C6.2@2991,3201 3146,3201 Y1.1@3192,3155 ; Y1.1@3220,3164 3248,3192 NU1.76@3455,3192
PC0: NU1.26
PC1: NU1.27
PC2: NU1.28
PC3: NU1.29
PC4: NU1.44
PC5: NU1.45
PC6: NU1.96
PC7: NU1.97
PC8: NU1.98
PC9: NU1.99
PC10: NU1.111
PC11: NU1.112
PC12: NU1.113
PC13: NU1.7
PC14: NU1.8
PC15: NU1.9
PD2: NU1.116
PD3: NU1.117
PD4: NU1.118 U2.41 U4.34 U5.8 | length 2145.3
  Top Layer w8: NU1.118@3745,2437 3745,2377 v1@3750,2372 ; v1@4746,2140 U5.8@4803,2140 ; U5.8@4826,2141 4922,2141 5001,2220 5001,2332 5243,2574 5305,2574 5380,2649 U4.34@5380,2683 ; v1@6006,2786 U2.41@6081,2786
  Bottom Layer w8: v1@3754,2366 3979,2141 v1@4743,2141
  other v1: 4742,2140 3752,2368 6009,2787
PD5: NU1.119 U2.17 U4.13 U5.18 | length 2582.2
  Top Layer w8: NU1.119@3767,2441 3767,2379 4200,1946 U5.18@4822,1946 ; U4.13@5575,3451 5575,3500 v1@5580,3505 ; v1@6351,3201 U2.17@6508,3201
  Bottom Layer w8: v1@5579,3502 5607,3530 6286,3530 6341,3475 6341,3217 v1@6354,3204
  other v1: 6355,3200 5579,3503
PD6: NU1.122 P5.1 R13.2 U4.17
PD7: NU1.123 U5.9 | length 1117.3
  Top Layer w8: NU1.123@3841,2437 3841,2408 4129,2120 U5.9@4810,2120
PE0: NU1.141 U2.39 | length 75.7
  Top Layer w8: v1@6013,2854 6017,2858 U2.39@6087,2858
  other v1: 6014.28,2855.28
PE1: NU1.142 U2.40 | length 70
  Top Layer w8: v1@6013,2820 U2.40@6083,2820
  other v1: 6016,2817
PF6: NU1.18
PF10: NU1.22
PF11: NU1.49
PG6: NU1.91 P5.3 R12.1
PG7: NU1.92
PG8: NU1.93
PG9: NU1.124 R11.1 U4.32
PG10: NU1.125 R9.1 U2.6 | length 4260.3
  Top Layer w8: NU1.125 3883,2467.46 3883,2396 4102,2177 v2@4710,2177 ; v2(6396,2516) R9.1 6396,2776 6473.48,2853.48 U2.6
  Bottom Layer w8: v2(4708,2174) 4798,2174 4798,2020 5388,1430 5855,1430 6397,1972 v2@6397,2517
PG11: NU1.126
PG12: NU1.127
PG13: NU1.128
PG14: NU1.129
PG15: NU1.132
R1IN: P3.1 U1.13
T1OUT: P3.3 U1.14
"USB 5V": P20.1
VDD5: C2.1 C8.1 C9.1 C11.1 C13.2 J1.1 U1.16 U3.3
VDD33: C7.2 C10.1 C12.1 C14.2 C15.2 C16.2 C17.2 C18.2 C19.2 C20.2 C21.1 C22.1 C23.1 D1.1 D2.1 D3.1 L1.2 NU1.17 NU1.39 NU1.52 NU1.62 NU1.72 NU1.84 NU1.95 NU1.108 NU1.121 NU1.131 NU1.144 P7.1 P8.1 P8.2 R6.2 R8.1 R9.2 R10.2 R11.2 R12.2 R13.1 R14.1 R15.1 R16.2 R18.2 R19.2 R20.2 R21.2 U2.11 U2.33 U3.2 U4.29 U4.43 U5.12 U5.37 | length 994.1
  Top Layer w8: NU1.17@4350,2877 4559,2877 C7.2@4560,2876 ; C14.2@4557,2941 4557,2872 C7.2@4568,2861 ; U4.43@5555,2700 5555,2770 5828,3043 U2.33@6071,3043
pads on no net: NU1.6 NU1.85 NU1.86 NU1.106 P20.5 P20.6 REST1.3 REST1.4 U1.7 U1.8 U1.9 U1.10 U4.1 U4.27 U4.28 U4.30 U4.55 U4.56 U5.1 U5.2 U5.3 U5.4 U5.5 U5.6 U5.10 U5.11 U5.14 U5.15 U5.20 U5.21 U5.22 U5.23 U5.24 U5.25 U5.26 U5.27 U5.28 U5.33 U5.34 U5.35 U5.38 U5.39 U5.40 U5.45 U5.46 U5.47 U5.48

## Keep-outs
Keep-Out Layer:
  lines w10: 6655,1390 1560,1390 1560,4605 1560,4865 1575,4880 6655,4880 ; 7031,1378 7031,4868

## Text inside footprints (layer, text, board x,y; h text height)
P8: Top Overlay "20" at 3352,1653 h35 r180; Top Overlay "19" at 3352,1753 h35 r180; Top Overlay "1" at 4412,1753 h35 r180; Top Overlay "2" at 4412,1653 h35 r180